# Altium PCB Face_MainBack1V0.PcbDoc
Units mm, origin at the board's own origin, x right, y up, seen from the top; angles counter-clockwise.
Board outline 96 x 44.5 mm, 2 copper layers (Top Layer, Bottom Layer); 48 components, 36 nets, 202 pads, 215 vias.
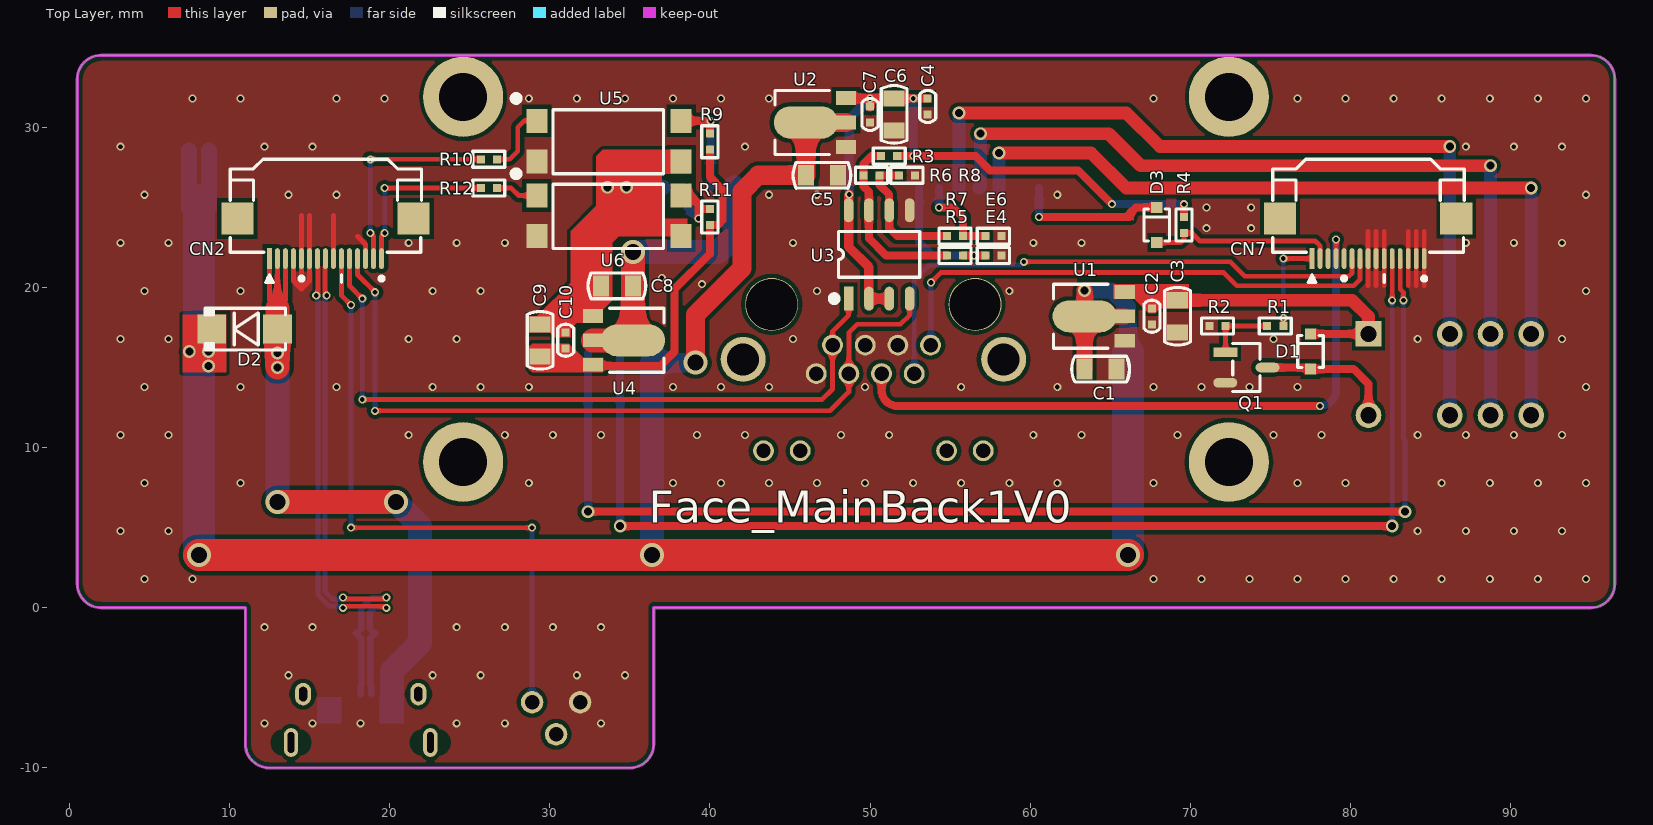
[diagram p0: Top Layer view]
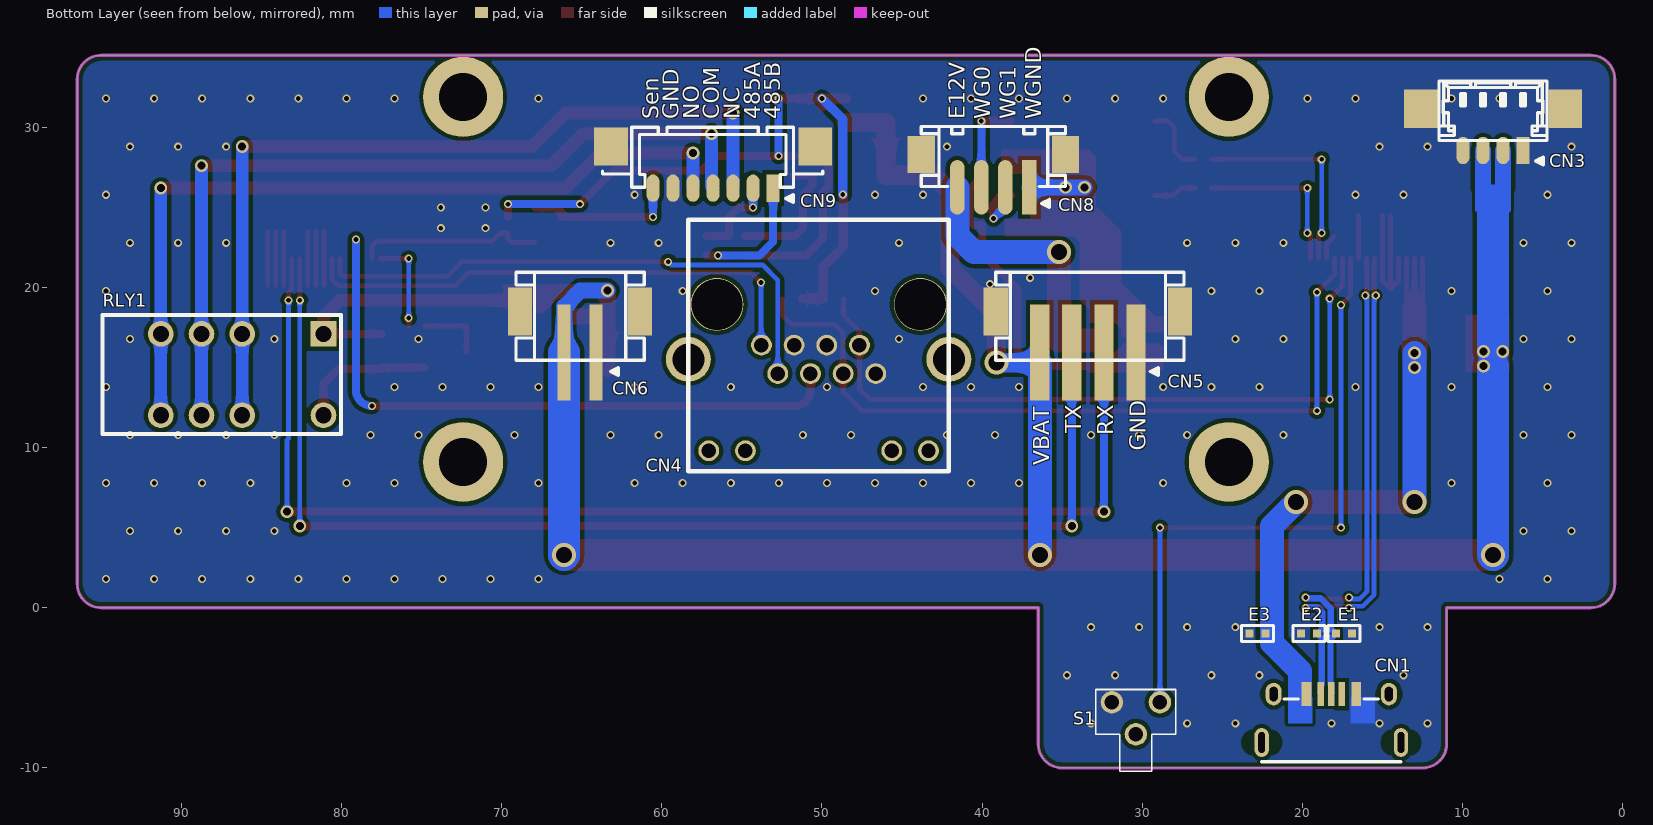
[diagram p1: Bottom Layer view, seen from below]
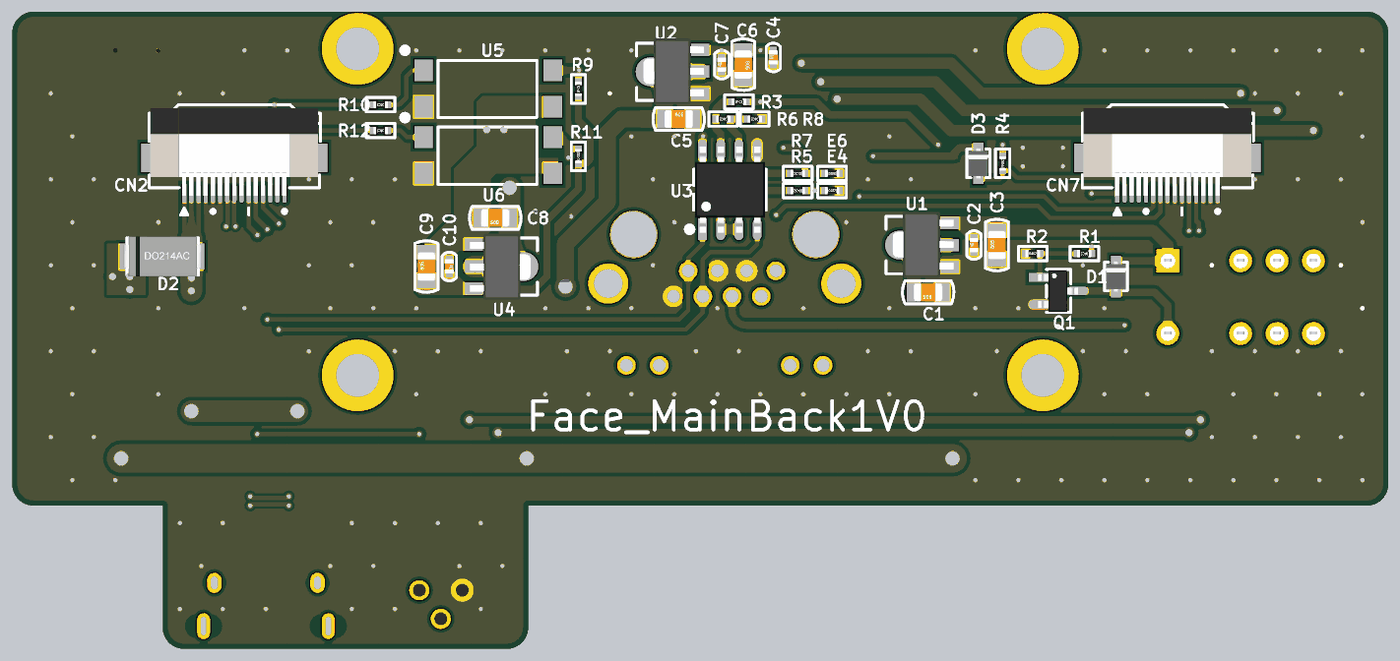
[diagram p2: 3D render of the assembled board from above, using the file's embedded part models]
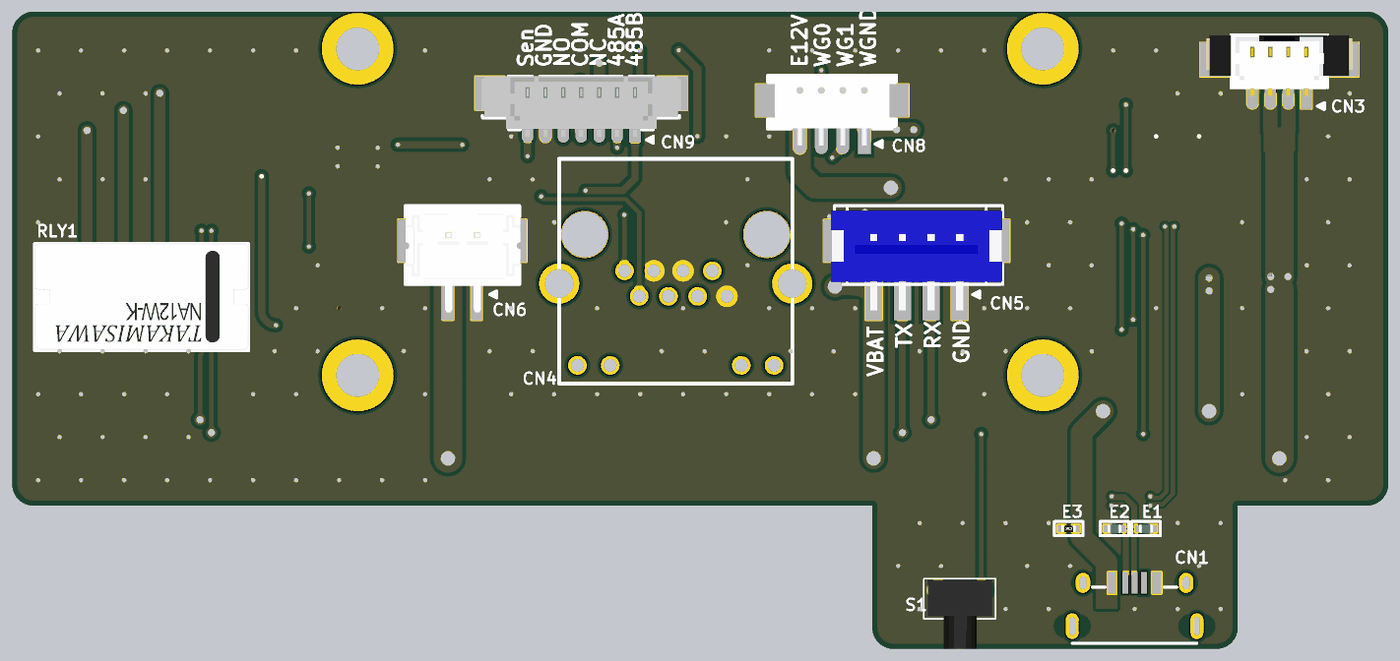
[diagram p3: 3D render of the assembled board from below, using the file's embedded part models]

## Layer stack, top to bottom
Top Solder: solder mask 0.0102, Solder Resist, Dk 3.5
Top Layer: signal copper 0.0356
Dielectric 1: dielectric 0.32, FR-4, Dk 4.8
Bottom Layer: signal copper 0.0356
Bottom Solder: solder mask 0.0102, Solder Resist, Dk 3.5

## Board outline
2,0.003 cw(c2,1.503) 0.5,1.503 0.5,33 cw(c2,33) 2,34.5 95,34.5 cw(c95,33) 96.5,33 96.5,1.5 cw(c95,1.5) 95,0 36.5,0 36.5,-8.5 cw(c35,-8.5) 35,-10 12.5,-10 cw(c12.5,-8.5) 11,-8.5 11,0.003

## Design rules (kind name [scope] priority, off if disabled: settings)
Clearance Clearance_1 [InDifferentialPair('D1')] p1: gap=0.15 ignorepadtopadclearanceinfootprint=FALSE
Clearance [All] p2: gap=0.2 ignorepadtopadclearanceinfootprint=FALSE except(0.254: Arc-Poly Track-Poly SMDPad-Poly THPad-Poly Via-Poly Fill-Poly Poly-Poly)
DiffPairsRouting [All] p1: maxlimit=0.15 minlimit=0.15 mostfreqgap=0.15 toplayer_minwidth=0.3 toplayer_maxwidth=0.4 toplayer_prefwidth=0.4 bottomlayer_minwidth=0.3 bottomlayer_maxwidth=0.4 bottomlayer_prefwidth=0.4 maxuncoupledlength=12.7
HoleSize [All] p1: absolutevalues=TRUE maxlimit=5 minlimit=0.025 maxpercent=80.000 minpercent=20.000
HoleToHoleClearance [All] p1: gap=0 allowstackedmicrovias=TRUE
MinimumSolderMaskSliver [All] p1: minsoldermaskwidth=0
PolygonConnect [All] p1: connectstyle=Direct reliefconductorwidth=0.254 reliefentries=4 polygonreliefangle="90 Angle" airgapwidth=0.254
RoomDefinition Face_MainBack1V0 [InComponentClass('Face_MainBack1V0')] p1: confinementstyle=ConfineIn formatcopy=TRUE lockcomponents=FALSE outline 97,-11.5 0,-11.5 0,34.5 97,34.5
RoutingVias [All] p1: holewidth=0.3 width=0.5 viastyle="Through Hole" minholewidth=0.3 minwidth=0.5 maxholewidth=2 maxwidth=5
ShortCircuit [All] p1: allowed=TRUE
SilkToSilkClearance [All] p1: silktosilkclearance=0
SilkToSolderMaskClearance [IsPad] p1: minsilkscreentomaskgap=0 clearancetoexposedcopper=TRUE
SolderMaskExpansion [All] p1: expansion=0.102 istentingtop=FALSE
UnRoutedNet [All] p1: checkbadconnections=TRUE
Width [All] p1: maxlimit=3 minlimit=0.2 preferedwidth=0.2
22 further rules are at their usual default settings.

## Classes and differential pairs
differential pair class 90ohm: D1
net class 90ohm: D1_N D1_P
differential pair D1: +D1_P -D1_N

## Components (designator, comment, footprint, x,y, rotation, side; value= is the part's Value field where it differs from the comment)
C1 "10uF/16V" C0805 64.4,14.9 r180 top
C2 "100nF/16V" C0402 67.6,18.2 r90 top
C3 "22uF/16V" C0805 69.2,18.2 r90 top
C4 "NC/100nF/16V" C0402 53.6,31.3 r90 top
C5 "NC/10uF/16V" C0805 47,27 r0 top
C6 "NC/10uF/16V" C0805 51.5,30.8 r270 top
C7 "NC/100nF/16V" C0402 50,30.8 r90 top
C8 "NC/10uF/16V" C0805 34.2,20.1 r180 top
C9 "NC/10uF/16V" C0805 29.4,16.7 r90 top
C10 "NC/100nF/16V" C0402 31,16.7 r270 top
CN1 "micro USB" MICRO_5P_?? 18.2,-6.9 r180 bottom
CN2 "FPC0.5_15P_UP" FPC15_0.5_BOTTOM_Drawer 16,23.05 r0 top locked
CN3 "SH1.25_4P_SMD TOP" SH1.25_4P_SMD_TOP 8.1,30 r0 bottom
CN4 "RJ45( 8P8C , LED-2)" RJ45_S 53.78,16.4 r0 bottom locked
CN5 "PH2.0_4P_SMD_TOP" PH2.0_4P_SMD_TOP 33.4,17.225 r0 bottom locked
CN6 "PHB2.0_2P_SMD_TOP" PH2.0_2P_SMD_TOP 64.1,15.95 r0 bottom
CN7 "FPC0.5_15P_UP" FPC15_0.5_BOTTOM_Drawer 81.1,23.05 r0 top locked
CN8 "NC/ZH1.5_4P_SMD_TOP" ZH1.5_4P_SMD_TOP 39.3,27.5 r270 bottom locked
CN9 "NC/SH1.25_7P_SMD_TOP" SH1.25_7P_SMD_TOP 56.8,27.5 r0 bottom locked
D1 "1N4148WS" SOD-323 77.5,16 r90 top
D2 "SS34 (DO-214AC)" DO-214AC 11,17.4 r0 top
D3 "1N4148WS" SOD-323 67.9,23.9 r90 top
E1 "SLESDL0402-24" L0402 17.4,-1.6 r0 bottom
E2 "SLESDL0402-24" L0402 19.6,-1.6 r0 bottom
E3 "SFI0402-050E330NP-LF" R0402 22.8,-1.6 r180 bottom
E4 "NC/SFI0402-050E330NP-LF" R0402 57.7,22 r0 top
E6 "NC/SFI0402-050E330NP-LF" R0402 57.7,23.2 r180 top
Q1 "LMBT3904 (SOT-23-3)" SOT-23-3 73.5,15 r270 top
R1 "47K" R0402 75.3,17.6 r180 top
R2 "47K" R0402 71.7,17.6 r0 top
R3 "NC/3.3K" R0402 51.2,28.2 r0 top
R4 "10K" R0402 69.6,23.9 r90 top
R5 "NC/22R" R0402 55.3,22 r180 top
R6 "NC/120R" R0402 50.1,27 r180 top
R7 "NC/22R" R0402 55.3,23.2 r180 top
R8 "NC/3.3K" R0402 52.3,27 r180 top
R9 "NC/2.2K 1%" R0402 40,29.1 r90 top
R10 "NC/220R" R0402 26.2,28 r180 top
R11 "NC/2.2K 1%" R0402 40,24.4 r90 top
R12 "NC/220R" R0402 26.2,26.2 r180 top
RLY1 "FUJITSU NA5W-K     DPDT-BM 5V" NA12W-K 81.12,17.1 r0 bottom
S1 "KEY 4.5x4.5" KEY4.5*4.5-5MM-R 30.4,-7.9 r180 bottom
U1 "HT7150-1 (SOT-89)" SOT-89 65.9,18.2 r90 top
U2 "NC/HT7333-1 (SOT-89)" SOT-89 48.5,30.3 r90 top
U3 "NC/MAX3485ESA(SOIC-8)" SOIC8 48.66,19.3 r0 top
U4 "NC/HT7150-1 (SOT-89)" SOT-89 32.7,16.7 r270 top
U5 "NC/LTV-817S-TA1-C" LTV-817S-TA1-C 29.2,30.4 r270 top
U6 "NC/LTV-817S-TA1-C" LTV-817S-TA1-C 29.2,25.74 r270 top

## Footprints (in the part's own frame and the unit in brackets; to place one, negate y for a bottom-side part, rotate by r counter-clockwise, add the part's x,y. Pads: shape width x height; smd on the part's side, far side on the other; paste and mask are expansions set on the pad)
C0402 [mm]
  rect 0.5x0.5 smd: 1(-0.5,0) 2(0.5,0)
  silkscreen extent -1,-0.5 1,0.5, body extent -0.5,-0.3 0.5,0.3, height 0.2
C0805 [mm]
  rect 1x1.3 smd: 1(1,0) 2(-1,0)
  silkscreen extent -1.8,-0.8 1.8,0.8, body extent -1,-0.62 1,0.63, height 0.78
DO-214AC [mm]
  rect 1.8x1.8 smd: 1(2,0) 2(-2.1,0)
  silkscreen extent -2.5,-1.3 2.5,1.3, body extent -2.74,-1.4 2.74,1.4, height 2.24
FPC15_0.5_BOTTOM_Drawer [mm]
  rect 0.3x1.3 smd mask+0.05: 1(-3.5,-1.25)
  oval 0.3x1.3 smd mask+0.05: 2(-3,-1.25) 3(-2.5,-1.25) 4(-2,-1.25) 5(-1.5,-1.25) 6(-1,-1.25) 7(-0.5,-1.25) 8(0,-1.25) 9(0.5,-1.25) 10(1,-1.25) 11(1.5,-1.25) 12(2,-1.25) 13(2.5,-1.25) 14(3,-1.25) 15(3.5,-1.25)
  rect 2x2 smd: 16(-5.5,1.25) 17(5.5,1.25)
  silkscreen extent -5.95,-2.75 6,4.95, body extent -5.87,-1.41 5.85,4.7, height 2
KEY4.5*4.5-5MM-R [mm]
  round 1.4 hole 0.9: 1(1.5,2) 2(-1.5,2) 3(0,0)
  silkscreen extent -2.5,-2.3 2.5,2.8, body extent -2.23,-2.09 2.27,2.71, height 4.5
L0402 [mm]
  rect 0.5x0.5 smd: 1(0.5,0) 2(-0.5,0)
  silkscreen extent -1,-0.5 1,0.5, body extent -0.5,-0.3 0.5,0.3, height 0.5
LTV-817S-TA1-C [mm] "LTV-817S-TA1-C"
  rect 1.5x1.3 smd: 1(0,0) 2(2.54,0) 3(2.54,9) 4(0,9)
  silkscreen extent -1.6,-1.5 3.3,7.9, body extent -0.8,0.1 3.3,8.9, height 3.5
MICRO_5P_?? [mm]
  rect 0.6x1.5 smd: 1(-1.55,1.51) 5(1.55,1.51)
  rect 0.4x1.5 smd: 2(-0.65,1.51) 3(0,1.51) 4(0.65,1.51)
  oval 1x1.4 hole 0.9 slot 0.5 at 0 deg: 6(-3.6,1.51) 7(3.6,1.51)
  oval 0.9x1.8 hole 1.3 slot 0.4 at 0 deg: 8(-4.35,-1.51) 9(4.35,-1.51)
  silkscreen extent -4.35,-2.71 4.35,1.21
NA12W-K [mm]
  rect 1.6x1.6 hole 1: 1(0,0)
  round 1.6 hole 1: 3(5.08,0) 4(7.62,0) 5(10.16,0) 8(10.16,5.08) 9(7.62,5.08) 10(5.08,5.08) 12(0,5.08)
  silkscreen extent -1.1,-1.17 13.8,6.25, body extent -1.1,-1.2 13.8,6.2, height 9.7
PH2.0_2P_SMD_TOP [mm] "WAFER 2.0mm TOP ENTRY SMT"
  rect 0.8x6 smd mask+0.05: 1(0,0) 2(2,0)
  rect 1.5x3 smd mask+0.05: 3(-2.75,-2.55) 4(4.75,-2.55)
  round 1.2 on Mech4: ""(0,-2.45) ""(2,-2.45)
  silkscreen extent -3,-5 5,1.45, body extent -3.05,-4.95 4.95,2.45, height 6.5
PH2.0_4P_SMD_TOP [mm] "WAFER 2.0mm TOP ENTRY SMT"
  rect 1.2x6 smd mask+0.05: 1(-3,1.275) 2(-1,1.275) 3(1,1.275) 4(3,1.275)
  rect 1.5x3 smd mask+0.05: 5(-5.75,-1.275) 6(5.75,-1.275)
  round 1.2 on Mech4: ""(-3,-1.175) ""(-1,-1.175) ""(1,-1.175) ""(3,-1.175)
  silkscreen extent -6,-3.72 5.75,2.73, body extent -5.97,-3.4 5.98,3.6, height 6.6
R0402 [mm]
  rect 0.5x0.5 smd: 1(0.5,0) 2(-0.5,0)
  silkscreen extent -1,-0.5 1,0.5, body extent -0.5,-0.25 0.5,0.25, height 0.35
RJ45_S [mm]
  round 1.3 hole 0.9: 1(0,0) 2(-1.02,1.78) 3(-2.04,0) 4(-3.06,1.78) 5(-4.08,0) 6(-5.1,1.78) 7(-6.12,0) 8(-7.14,1.78) 9(-10.43,6.6) 10(-8.14,6.6) 11(1,6.6) 12(3.29,6.6)
  round 2.8 hole 2: 13(-11.7,0.89) 14(4.56,0.89)
  round 3.3 hole 3.2: 15(-9.92,-2.54) 16(2.78,-2.54)
  silkscreen extent -11.7,-7.82 4.56,7.88
SH1.25_4P_SMD_TOP [mm] "WTB 1.25MM WAFER TOP Entry"
  rect 0.8x1.7 smd mask+0.05: 1(-1.875,1.45)
  oval 0.8x1.7 smd mask+0.05: 2(-0.625,1.45) 3(0.625,1.45) 4(1.875,1.45)
  rect 2.1x2.4 smd mask+0.05: 5(-4.5,-1.15) 6(4.5,-1.15)
  silkscreen extent -3.37,-2.88 3.37,2.35, body extent -5.07,-2.83 5.08,1.4, height 4.65
SH1.25_7P_SMD_TOP [mm] "WAFER 1.25mm TOP ENTRY SMT"
  rect 0.8x1.7 smd mask+0.05: 1(-3.75,1.3)
  oval 0.8x1.7 smd mask+0.05: 2(-2.5,1.3) 3(-1.25,1.3) 4(0,1.3) 5(1.25,1.3) 6(2.5,1.3) 7(3.75,1.3)
  rect 2.1x2.4 smd mask+0.05: 8(-6.375,-1.3) 9(6.375,-1.3)
  silkscreen extent -6.85,-2.5 6.9,2.2, body extent -6.95,-2.5 6.95,1.73, height 4.65
SOD-323 [mm]
  rect 0.7x0.7 smd: 1(-1.1,0) 2(1.1,0)
  silkscreen extent -1,-0.8 1,0.8, body extent -1.41,-0.65 1.41,0.65, height 1.01
SOIC8 [mm]
  rect 0.6x1.5 smd: 1(0,0)
  oval 0.6x1.5 smd: 2(1.27,0) 3(2.54,0) 4(3.81,0) 5(3.81,5.52) 6(2.54,5.52) 7(1.27,5.52) 8(0,5.52)
  silkscreen extent -1.1,-0.2 4.44,4.19, body extent -0.53,-0.24 4.37,5.76, height 1.75
SOT-23-3 [mm]
  rect 0.6x1.5 smd mask+0.05: 1(-0.95,-1.32)
  oval 0.6x1.5 smd mask+0.05: 2(0.95,-1.32) 3(0,1.32)
  silkscreen extent -1.5,-0.85 1.5,0.85, body extent -1.44,-1.44 1.46,1.36, height 1.3
SOT-89 [mil]
  rect 34x50 smd: 1(-60,0) 2(0,0) 3(60,0)
  oval 78.74x157.48 smd: 2(0,98.43)
  silkscreen extent -79,41 79,175, body extent -90,-11 91,156, height 70
ZH1.5_4P_SMD_TOP [mm] "WAFER 1.5mm TOP ENTRY SMT"
  rect 3.4x0.9 smd mask+0.05: 1(1.25,2.25)
  oval 3.4x0.9 smd mask+0.05: 2(1.25,0.75) 3(1.25,-0.75) 4(1.25,-2.25)
  rect 2.3x1.7 smd mask+0.05: 5(-0.8,4.5) 6(-0.8,-4.5)
  silkscreen extent -2.55,-4.5 2.5,4.5, body extent -2.55,-4.5 2.34,4.5, height 4.88

## Part data
C1 C5 C6 C8 C9: library part CAP, "10uF/16V 10% 0805 X7R ROHS"
C2 C4 C7 C10: library part CAP, "100nF/16V 10% 0402 X7R ROHS"
C3: library part CAPACITOR, "22uF/16V 20% 0805 X7R ROHS"
CN1: library part CON5, "Micro USB"
CN2 CN7: library part "Header 15", LatestRevisionDate=17-Jul-2002, LatestRevisionNote="Re-released for DXP Platform.", Publisher="Altium Limited"
CN3 CN5: library part "Header 4", LatestRevisionDate=17-Jul-2002, LatestRevisionNote="Re-released for DXP Platform.", Publisher="Altium Limited"
CN4: library part RJ45
CN6: library part "Header 2"
CN8: library part "Header 4", "ZH1.5_4P_SMD_TOP", LatestRevisionDate=17-Jul-2002, LatestRevisionNote="Re-released for DXP Platform.", Publisher="Altium Limited"
CN9: library part Component_1, "SH1.25_7P_SMD_TOP"
D1 D3: library part DIODE
E1 E2: library part RES, "SLESDL0402-24 0402 ROHS", Parameter 1="0R 5% 1/10W 0603 RoHS", Parameter 2="0R 5% 1/8W 0805 RoHS", Parameter 3="0.25R 1% 1/4W 1206 ROHS", Parameter 4="0.25R 1% 1/2W 1812 ROHS", Parameter 5="0R 1% 1/16W 0402 RoHS", 名称=贴片电阻
E3: library part VARISTOR
E4 E6: library part VARISTOR, "SFI0402-050E330NP-LF"
Q1: library part NPN1
R1 R2: library part RES2, "47K +/-5% 1/16W 0402 ROHS"
R3 R8: library part RES2, "3.3K +/-5% 1/16W 0402 ROHS"
R4: library part RES2, "10K +/-5% 1/16W 0402 ROHS"
R5 R7: library part RES2, "22R +/-5% 1/16W 0402 ROHS"
R6: library part "Res Semi", "120R +/-5% 1/16W 0402 ROHS"
R9 R11: library part Res2, "2.2K +/-1% 1/16W 0402 ROHS", LatestRevisionDate=17-Jul-2002, LatestRevisionNote="Re-released for DXP Platform.", PackageDescription="Axial Device, Thru-Hole; 2 Leads; 0.4 in Pin Spacing", PackageReference=AXIAL-0.4, Published=8-Jun-2000, Publisher="Altium Limited"
R10 R12: library part Res2, "220R +/-5% 1/16W 0402 ROHS", LatestRevisionDate=17-Jul-2002, LatestRevisionNote="Re-released for DXP Platform.", PackageDescription="Axial Device, Thru-Hole; 2 Leads; 0.4 in Pin Spacing", PackageReference=AXIAL-0.4, Published=8-Jun-2000, Publisher="Altium Limited"
RLY1: library part RELAY4
S1: library part "Header 2X2H", "KEY6x6x14", LatestRevisionDate=17-Jul-2002, LatestRevisionNote="Re-released for DXP Platform.", Publisher="Altium Limited"
U1: library part HT7333, "IC"
U2 U4: library part HT7333
U3: library part MAX485
U5 U6: library part Optoisolator1, "LTV-817S-TA1-C", DatasheetVersion=Nov-2003, LatestRevisionDate=04-Mar-2005, LatestRevisionNote="Sch pins 3 & 4 Swapped.", PackageReference=DIP-4, Published=24-Mar-1999, Publisher="Altium Limited"
D2: 名称=贴片二极管, 物料编号=EEJ00001, 规格，型号="SS34 (DO-214AC)"

## Free pads (board coordinates)
  round 5 hole 3: 0(24.6,9.1) 0(24.6,31.9) 0(72.4,9.1) 0(72.4,31.9)

## Via types
v1: diameter 0.5, hole 0.3, Top Layer to Bottom Layer, tented both sides, 190 vias
v2: diameter 0.8, hole 0.5, Top Layer to Bottom Layer, tented both sides, 18 vias
v3: diameter 1.5, hole 1, Top Layer to Bottom Layer, tented both sides, 7 vias

## Nets (pads, with @x,y where several pads share a name; then routed paths per layer and width w, separated by ;. In a path a pad name is that pad's centre, name@x,y a point inside that pad or via, vN(x,y) a via of type N, cw(c..) or ccw(c..) an arc to the next point about the centre after c; other vN are vias at no path point)
COMMON: CN9.4 RLY1.4 RLY1.9 | length 51.7
  Top Layer w0.8: v2(56.9,29.6) 64.9,29.6 66.9,27.6 v2(88.74,27.6)
  Bottom Layer w0.8: CN9.4 56.9,26.3 v2(56.9,29.6) ; RLY1.9 RLY1.4 v2(88.74,27.6)
CVBS_OUT: CN4.4 CN7.4 | length 41.1
  Top Layer w0.3: CN7.4 v1(79.1,23)
  Top Layer w0.5: CN4.4 50.72,13.59 ccw(c51.71,13.59) 51.71,12.6 v1(78.1,12.6)
  Bottom Layer w0.5: v1(78.1,12.6) ccw(c78.1,13.6) 79.1,13.6 v1(79.1,23)
D1_N: CN1.2 CN2.7 E2.2 | length 32.4
  Top Layer w0.3: v1(15.425,19.5) 15.425,19.554 15.525,19.654 15.525,20.746 15.525,21.275 15.5,21.3 CN2.7 ; v1(17.1,0) 17.154,0 17.254,0.1 19.646,0.1 19.746,0 v1(19.8,0)
  Bottom Layer w0.3: v1(15.425,19.5) 15.425,19.446 15.525,19.346 15.525,0.811 16.236,0.1 16.946,0.1 17.046,0 v1(17.1,0)
  Bottom Layer w0.4: CN1.2 18.85,-4.84 18.8,-4.79 18.8,-1.9 E2.2 19.05,-1.55 19.009,-1.55 18.775,-1.316 18.775,-0.271 19.096,0.05 19.679,0.05 19.729,0 v1(19.8,0)
D1_P: CN1.3 CN2.8 E1.1 | length 32.6
  Top Layer w0.3: CN2.8 16,21.3 15.975,21.275 15.975,20.56 15.975,19.654 16.075,19.554 v1(16.075,19.5) ; v1(17.1,0.65) 17.154,0.65 17.254,0.55 19.646,0.55 19.746,0.65 v1(19.8,0.65)
  Bottom Layer w0.3: v1(16.075,19.5) 16.075,19.446 15.975,19.346 15.975,0.997 16.422,0.55 16.946,0.55 17.046,0.65 v1(17.1,0.65)
  Bottom Layer w0.4: CN1.3 18.2,-4.84 18.25,-4.79 18.25,-1.95 E1.1 17.95,-1.55 17.991,-1.55 18.225,-1.316 18.225,-0.043 18.868,0.6 19.75,0.6 v1(19.8,0.65)
DOOR-SENSE: CN7.2 D3.1 R4.2 | length 11.8
  Top Layer w0.3: D3.1 69.4,22.8 69.6,23 R4.2 70.1,23.4 70.6,22.9 77.795,22.9 78.1,22.595 CN7.2
E12V: C8.2 CN8.4 U4.2 | length 17.8
  Top Layer w1.5: U4.2@32.7,16.7 35.2,16.7 C8.2 v3(35.2,22.2)
  Bottom Layer w1.5: v3(35.2,22.2) 40.5,22.2 41.55,23.25 CN8.4
FGND: C8.1 C9.1 C10.1 CN8.1 U4.1 U5.3 U6.3 | length 3.5
  Bottom Layer w1: v2(33.6,26.25) v2(34.8,26.25) CN8.1
GND: C1.2 C2.1 C3.2 C4.1 C5.1 C6.1 C7.1 CN1.5 CN2.4 CN2.5 CN2.6 CN2.9 CN2.13 CN3.1 CN3.4 CN3.5 CN3.6 CN4.3 CN4.5 CN4.8 CN5.1 CN5.5 CN5.6 CN6.1 CN6.3 CN6.4 CN7.3 CN7.5 CN7.8 CN7.9 CN7.10 CN7.13 CN7.14 CN7.15 CN8.5 CN8.6 CN9.6 CN9.8 CN9.9 E1.2 E2.1 E3.2 E4.1 E6.2 Q1.2 R2.2 R8.2 S1.2 U1.1 U2.1 U3.5 U5.2 U6.2 | length 36.2
  Top Layer w0.3: CN2.4 14,20.4 14.5,19.9 ; 14.5,24.5 CN2.5 14.5,19.9 ; 15,24.5 CN2.6 15,20.4 14.5,19.9 ; CN2.9 16.5,24.5 ; 18,23.2 18.5,22.7 CN2.13 ; 81.1,20.1 CN7.8 81.1,23.5 ; 81.6,20.1 CN7.9 81.6,23.5 ; 82.1,20.1 CN7.10 82.1,23.5 ; 83.6,20.1 CN7.13 83.6,23.5 ; 84.1,20.1 CN7.14 84.1,23.5 ; 84.6,20.1 CN7.15 84.6,23.5
  other v1: 12.194,-7.213 15.194,-7.213 18.194,-7.213 24.194,-7.213 27.194,-7.213 33.194,-7.213 13.694,-4.213 22.694,-4.213 25.694,-4.213 31.694,-4.213 34.694,-4.213 12.194,-1.213 15.194,-1.213 24.194,-1.213 27.194,-1.213 30.194,-1.213 33.194,-1.213 4.694,1.787 7.694,1.787 67.694,1.787 70.694,1.787 73.694,1.787 76.694,1.787 79.694,1.787 82.694,1.787 85.694,1.787 88.694,1.787 91.694,1.787 94.694,1.787 3.194,4.787 6.194,4.787 84.194,4.787 87.194,4.787 90.194,4.787 93.194,4.787 4.694,7.787 10.694,7.787 28.694,7.787 37.694,7.787 40.694,7.787 43.694,7.787 46.694,7.787 49.694,7.787 52.694,7.787 55.694,7.787 58.694,7.787 61.694,7.787 67.694,7.787 76.694,7.787 79.694,7.787 85.694,7.787 88.694,7.787 91.694,7.787 94.694,7.787 3.194,10.787 6.194,10.787 21.194,10.787 27.194,10.787 30.194,10.787 33.194,10.787 39.194,10.787 42.194,10.787 48.194,10.787 51.194,10.787 60.194,10.787 63.194,10.787 69.194,10.787 75.194,10.787 78.194,10.787 84.194,10.787 87.194,10.787 90.194,10.787 93.194,10.787 4.694,13.787 10.694,13.787 16.694,13.787 22.694,13.787 25.694,13.787 28.694,13.787 37.694,13.787 40.694,13.787 43.694,13.787 49.694,13.787 55.694,13.787 61.694,13.787 67.694,13.787 70.694,13.787 73.694,13.787 76.694,13.787 94.694,13.787 3.194,16.787 6.194,16.787 21.194,16.787 24.194,16.787 45.194,16.787 75.194,16.787 84.194,16.787 93.194,16.787 4.694,19.787 10.694,19.787 22.694,19.787 25.694,19.787 46.694,19.787 58.694,19.787 94.694,19.787 39.5,20.2 37,20.6 3.194,22.787 6.194,22.787 21.194,22.787 24.194,22.787 27.194,22.787 45.194,22.787 60.194,22.787 63.194,22.787 87.194,22.787 90.194,22.787 93.194,22.787 71,23.7 73.8,23.7 71,25 73.8,25 4.694,25.787 13.694,25.787 16.694,25.787 43.694,25.787 46.694,25.787 61.694,25.787 94.694,25.787 3.194,28.787 12.194,28.787 15.194,28.787 42.194,28.787 87.194,28.787 90.194,28.787 93.194,28.787 7.694,31.787 10.694,31.787 16.694,31.787 19.694,31.787 28.694,31.787 31.694,31.787 34.694,31.787 37.694,31.787 40.694,31.787 43.694,31.787 67.694,31.787 76.694,31.787 79.694,31.787 82.694,31.787 85.694,31.787 88.694,31.787 91.694,31.787 94.694,31.787
NC: CN9.3 RLY1.3 RLY1.10 | length 53
  Top Layer w0.8: v2(55.55,30.9) 66,30.9 68.1,28.8 v2(86.2,28.8)
  Bottom Layer w0.8: CN9.3 v2(55.55,30.9) ; RLY1.10 RLY1.3 v2(86.2,28.8)
NetD1_1: D1.1 Q1.3 RLY1.12 | length 8.7
  Top Layer w0.5: Q1.3 77.4,15 D1.1 80.2,14.9 81.12,13.98 RLY1.12
NetQ1_1: Q1.1 R1.1 R2.1 | length 4.3
  Top Layer w0.3: Q1.1 72.2,15.97 R2.1 R1.1
NetR3_2: R3.2 R5.1 R6.1 U3.7 | length 11.4
  Top Layer w0.5: R3.2 50.1,28.2 49.6,27.7 R6.1 49.6,26.3 49.93,25.97 U3.7 49.93,23.07 51,22 R5.1
NetR6_2: R6.2 R7.1 R8.1 U3.6 | length 8.6
  Top Layer w0.5: R8.1 R6.2 50.6,26.4 51.2,25.8 U3.6 51.2,23.7 51.7,23.2 R7.1
NetR10_2: R10.2 U5.1 | length 4.4
  Top Layer w0.3: R10.2 27.5,28 28,28.5 28,30 28.4,30.4 U5.1
NetR12_2: R12.2 U6.1 | length 2.7
  Top Layer w0.3: R12.2 27.6,26.2 28.06,25.74 U6.1
NO: CN9.5 RLY1.5 RLY1.8 | length 50.5
  Top Layer w0.8: v2(58.05,28.4) 63.8,28.4 66,26.2 v2(91.28,26.2)
  Bottom Layer w0.8: CN9.5 v2(58.05,28.4) ; RLY1.8 RLY1.5 v2(91.28,26.2)
RELAY-ON: CN7.1 R1.2 | length 6
  Top Layer w0.3: R1.2 v1(75.8,18.1) ; v1(75.8,21.8) CN7.1
  Bottom Layer w0.3: v1(75.8,18.1) v1(75.8,21.8)
RESET: CN2.10 S1.1 | length 39.2
  Top Layer w0.3: CN2.10 17,19.5 v1(17.6,18.9) ; v1(17.6,5) v1(28.9,5)
  Bottom Layer w0.3: v1(17.6,5) v1(17.6,18.9) ; S1.1 v1(28.9,5)
RS485_A: CN9.2 E6.1 R7.2 | length 5.5
  Top Layer w0.5: v1(54.3,25) 55.2,25 55.8,24.4 R7.2 E6.1
  Bottom Layer w0.5: v1(54.3,25) CN9.2
RS485_B: CN9.1 E4.2 R5.2 | length 8.6
  Top Layer w0.5: R5.2 v1(56.5,22) E4.2
  Bottom Layer w0.5: CN9.1 53.05,22.85 53.9,22 v1(56.5,22)
SENSE: CN9.7 D3.2 | length 9.5
  Top Layer w0.5: v1(60.55,24.4) 66.2,24.4 66.2,24.6 66.6,25 D3.2
  Bottom Layer w0.5: v1(60.55,24.4) CN9.7
UART0_RX: CN5.2 CN7.12 | length 76.9
  Top Layer w0.3: CN7.12 83.1,19.9 83.1,19.893 83.3,19.693 v1(83.3,19.2)
  Top Layer w0.5: v2(32.4,6) v2(83.4,6)
  Bottom Layer w0.3: v1(83.3,19.2) 83.3,10.573 83.4,10.473 v2(83.4,6)
  Bottom Layer w0.5: v2(32.4,6) CN5.2
UART0_TX: CN5.3 CN7.11 | length 75.8
  Top Layer w0.3: v1(82.6,19.2) CN7.11
  Top Layer w0.5: v2(34.4,5.1) v2(82.6,5.1)
  Bottom Layer w0.3: v2(82.6,5.1) v1(82.6,19.2)
  Bottom Layer w0.5: v2(34.4,5.1) CN5.3
UART1_RX: CN4.1 CN7.7 | length 32.8
  Top Layer w0.3: v1(53.8,20.3) 54.44,20.94 72.06,20.94 72.9,20.1 80.2,20.1 80.6,20.5 CN7.7
  Bottom Layer w0.3: CN4.1 53.8,16.42 v1(53.8,20.3)
UART1_TX: CN4.2 CN7.6 | length 35
  Top Layer w0.3: v1(59.6,21.6) 72.5,21.6 73.4,20.7 79.9,20.7 80.1,20.9 CN7.6
  Bottom Layer w0.3: CN4.2 52.76,20.46 53.7,21.4 59.4,21.4 v1(59.6,21.6)
UART2_RX: CN2.11 CN4.7 U3.1 | length 44.8
  Top Layer w0.3: CN2.11 17.5,20.1 v1(18.3,19.3) ; v1(18.3,13) 47,13 47.66,13.66 CN4.7 47.66,17.26 48.66,18.26 U3.1
  Bottom Layer w0.3: v1(18.3,13) v1(18.3,19.3)
UART2_TX: CN2.12 CN4.6 U3.4 | length 49
  Top Layer w0.3: CN2.12 18,20.8 v1(19.1,19.7) ; v1(19.1,12.3) 47.5,12.3 48.68,13.48 CN4.6 48.68,17.18 49.2,17.7 51.9,17.7 52.47,18.27 U3.4
  Bottom Layer w0.3: v1(19.1,12.3) v1(19.1,19.7)
VBAT: C1.1 C5.2 CN3.2 CN3.3 CN5.4 CN6.2 D2.2 U1.2 U2.2 | length 147.3
  Top Layer w1: C1.1 63.4,18.2 U1.2@65.9,18.2 ; U1.2@63.4,18.3 v2(63.4,19.8)
  Top Layer w1.2: v3(39.1,15.3) 39.1,18.3 42,21.2 42,25.978 43.022,27 C5.2 46,30.3 U2.2@48.5,30.3
  Top Layer w2: v3(8.1,3.3) v3(36.4,3.3) v3(66.1,3.3)
  Bottom Layer w1: 7.475,26.2 CN3.2 ; 8.725,26.2 CN3.3 ; v2(63.4,19.8) 65.1,19.8 66.1,18.8 CN6.2
  Bottom Layer w1.2: CN5.4 36.4,15.3 v3(39.1,15.3)
  Bottom Layer w1.5: v3(36.4,3.3) CN5.4@36.4,15.3
  Bottom Layer w2: v3(8.1,3.3) 8.1,15.1 ; 8.1,16 8.1,25.4 ; v3(66.1,3.3) CN6.2
  other v2: 8.7,15.1 7.5,16 8.7,16
VCC: C9.2 C10.2 R9.2 R11.2 U4.3 | length 20
  Top Layer w0.5: U4.3 32.776,15.1 36.9,15.1 37.8,16 37.8,19.9 40,22.1 R11.2 40.5,23.9 40.8,24.2 40.8,26.1 40,26.9 R9.2
VCC_3V3: C4.2 C6.2 C7.2 R3.1 R4.1 U2.3 U3.2 U3.3 U3.8 | length 44
  Top Layer w0.5: C6.2 v1(52.7,31.8) C4.2 ; R3.1 v1(52.7,28.2) 56.6,28.2 57.5,27.3 63,27.3 v1(65.1,25.2) ; R4.1 v1(69.6,25.2)
  Top Layer w0.6: U2.3 48.524,31.8 v1(50,31.8) ; v1(48.7,25.8) 48.66,25.76 U3.8 48.66,22.54 49.93,21.27 U3.2 U3.3 ; C7.2 v1(50,31.8) ; C6.2 v1(50,31.8)
  Bottom Layer w0.5: v1(52.7,28.2) v1(52.7,31.8) ; v1(65.1,25.2) v1(69.6,25.2)
  Bottom Layer w0.6: v1(48.7,25.8) 48.7,30.5 v1(50,31.8)
VCC_5V: C2.2 C3.1 D1.2 RLY1.1 U1.3 | length 21
  Top Layer w0.5: U1.3 66.576,19.724 C2.2 68.1,19.2 C3.1 ; D1.2 RLY1.1
  Top Layer w0.8: C3.1 80.1,19.2 81.12,18.18 RLY1.1
VCC_USB: CN1.1 CN2.1 CN2.2 CN2.3 D2.1 E3.1 | length 43.7
  Top Layer w0.3: CN2.1 12.5,19.2 13,18.7 ; CN2.2 13,18.7 ; CN2.3 13.5,19.2 13,18.7
  Top Layer w1.5: v3(13,6.6) v3(20.4,6.6) ; v2(13,15) D2.1 13,18.7
  Bottom Layer w1.5: v3(13,6.6) v2(13,15.9) ; 20.15,-5.6 20.15,-3.95 21.9,-2.2 21.9,5.1 v3(20.4,6.6)
WD_0: CN2.14 R10.1 | length 13.2
  Top Layer w0.3: v1(18.8,23.4) 19,23.2 CN2.14 ; v1(18.8,28) R10.1
  Bottom Layer w0.3: v1(18.8,23.4) v1(18.8,28)
WD_1: CN2.15 R12.1 | length 10.5
  Top Layer w0.3: CN2.15 19.5,23.2 v1(19.7,23.4) ; v1(19.7,26.2) R12.1
  Bottom Layer w0.3: v1(19.7,23.4) v1(19.7,26.2)
WG0: CN8.3 R9.1 U5.4 | length 6.8
  Top Layer w0.5: U5.4 v1(40.05,30.4) 40,30.35 R9.1
  Bottom Layer w0.5: CN8.3 v1(40.05,30.4)
WG1: CN8.2 R11.1 U6.4 | length 5.2
  Top Layer w0.5: U6.4 38.76,25.74 39.3,25.2 39.3,24.768 ; v1(39.3,24.3) 39.3,24.768 ; R11.1 39.432,24.9 39.3,24.768
  Bottom Layer w0.5: CN8.2 38.55,25.05 v1(39.3,24.3)
pads on no net: CN1.4 CN1.6 CN1.7 CN1.8 CN1.9 CN2.16 CN2.17 CN4.9 CN4.10 CN4.11 CN4.12 CN4.13 CN4.14 CN4.15 CN4.16 CN5. CN6. CN7.16 CN7.17 S1.3

## Polygon pours and split planes (outlines as drawn)
GND on Bottom Layer "Bottom Layer-GND" (solid, remove dead copper, pour order 0): 0.5,34.5 0.5,-10 96.5,-10 96.5,34.5
GND on Top Layer "Top Layer-GND" (solid, remove dead copper, pour order 2): 0.5,34.5 0.5,-10 96.5,-10 96.5,34.5

## Keep-outs
Keep-Out Layer:
  lines w0.2: 0.5,1.503 ccw(c2,1.503) 2,0.003 11,0.003 11,-8.5 ccw(c12.5,-8.5) 12.5,-10 ; 0.5,1.503 0.5,33 ; 0.5,1.503 0.5,1.503 ; 0.5,33 cw(c2,33) 2,34.5 ; 0.5,33 0.5,33 ; 2,34.5 95,34.5 ; 2,34.5 2,34.5 ; 12.5,-10 12.5,-10 ; 12.5,-10 35,-10 ; 35,-10 ccw(c35,-8.5) 36.5,-8.5 36.5,0 95,0 ccw(c95,1.5) 96.5,1.5 ; 35,-10 35,-10 ; 95,34.5 cw(c95,33) 96.5,33 ; 95,34.5 95,34.5 ; 96.5,1.5 96.5,1.5 ; 96.5,1.5 96.5,33 ; 96.5,33 96.5,33

## Other copper
Top Layer:
  region net FGND: 28.7,17.2 30,17.2 30.3,16.9 31.3,16.9 31.3,17.4 31.7,17.8 33.3,17.8 33.3,18.6 33.9,19.2 33.9,22.8 34.3,23.2 38.6,23.2 38.6,24.3 37,24.3 37,27.1 38.8,27.1 38.8,28.6 33.3,28.6 32.9,28.2 32.9,25.1 31.3,23.5 31.3,20.3 29.2,18.2 28.7,18.2
  region net VCC_5V: 65.2,20.2 65.2,19.3 66.5,19.3 67.4,18.4 67.8,18.4 68.1,18.7 69.9,18.7 69.9,20.2
  region net VCC: 33.3,14.7 33.3,15.6 32.1,15.6 31.2,16.5 28.9,16.5 28.7,16.3 28.7,14.9 28.9,14.7
  region net VBAT: 9.8,18.3 7.1,18.3 7.1,14.7 9.8,14.7
  pour cut-out: 83.4,22.5 84.8,22.5 84.8,21 83.4,21
  pour cut-out: 80.9,22.5 82.3,22.5 82.3,21 80.9,21
  pour cut-out: 18.3,22.6 18.7,22.6 18.7,21.1 18.3,21.1
  pour cut-out: 16.3,22.5 16.7,22.5 16.7,21 16.3,21
  pour cut-out: 13.8,22.5 15.2,22.5 15.2,21 13.8,21
Bottom Layer:
  region net VBAT: 7,26.4 7,24.8 7.1,24.7 9.1,24.7 9.2,24.8 9.2,26.4
  region net GND: 17,-7.2 15.5,-7.2 15.5,-5.6 17,-5.6
  region net VCC_USB: 19.4,-5.6 20.9,-5.6 20.9,-7.2 19.4,-7.2

## Silkscreen, mask and mechanical layers (free items; w line width, h text height)
Top Overlay:
  text "Face_MainBack1V0" at 36.2,5.3 h2
Bottom Overlay:
  text "WGND" at 36.3,30.5 h1 r270
  text "WG1" at 37.9,30.5 h1 r270
  text "WG0" at 39.5,30.5 h1 r270
  text "E12V" at 41.1,30.5 h1 r270
  text "485B" at 52.6,30.5 h1 r270
  text "485A" at 53.867,30.5 h1 r270
  text "NC" at 55.133,30.5 h1 r270
  text "COM" at 56.4,30.5 h1 r270
  text "NO" at 57.667,30.5 h1 r270
  text "GND" at 58.933,30.5 h1 r270
  text "Sen" at 60.2,30.5 h1 r270
  text "TX" at 33.8,10.89 h1 r270
  text "RX" at 31.8,10.785 h1 r270
  text "GND" at 29.8,9.79 h1 r270
  text "VBAT" at 35.8,8.9 h1 r270
Mechanical 1:
  lines w0.2: 11,0 11,-8.5 ccw(c12.5,-8.5) 12.5,-10 35,-10 ccw(c35,-8.5) 36.5,-8.5 36.5,0 95,0 ccw(c95,1.5) 96.5,1.5 96.5,33 ccw(c95,33) 95,34.5 2,34.5 ccw(c2,33) 0.5,33 0.5,1.503 ccw(c2,1.503) 2,0.003 11,0.003
  lines w0.4: 13.85,-8.86 13.85,-7.96 ; 22.55,-8.86 22.55,-7.96
  lines w0.5: 14.6,-5.59 14.6,-5.19 ; 21.8,-5.59 21.8,-5.19